# EAGLE board sterownik_uC_dla_TIER (EAGLE 4.13)
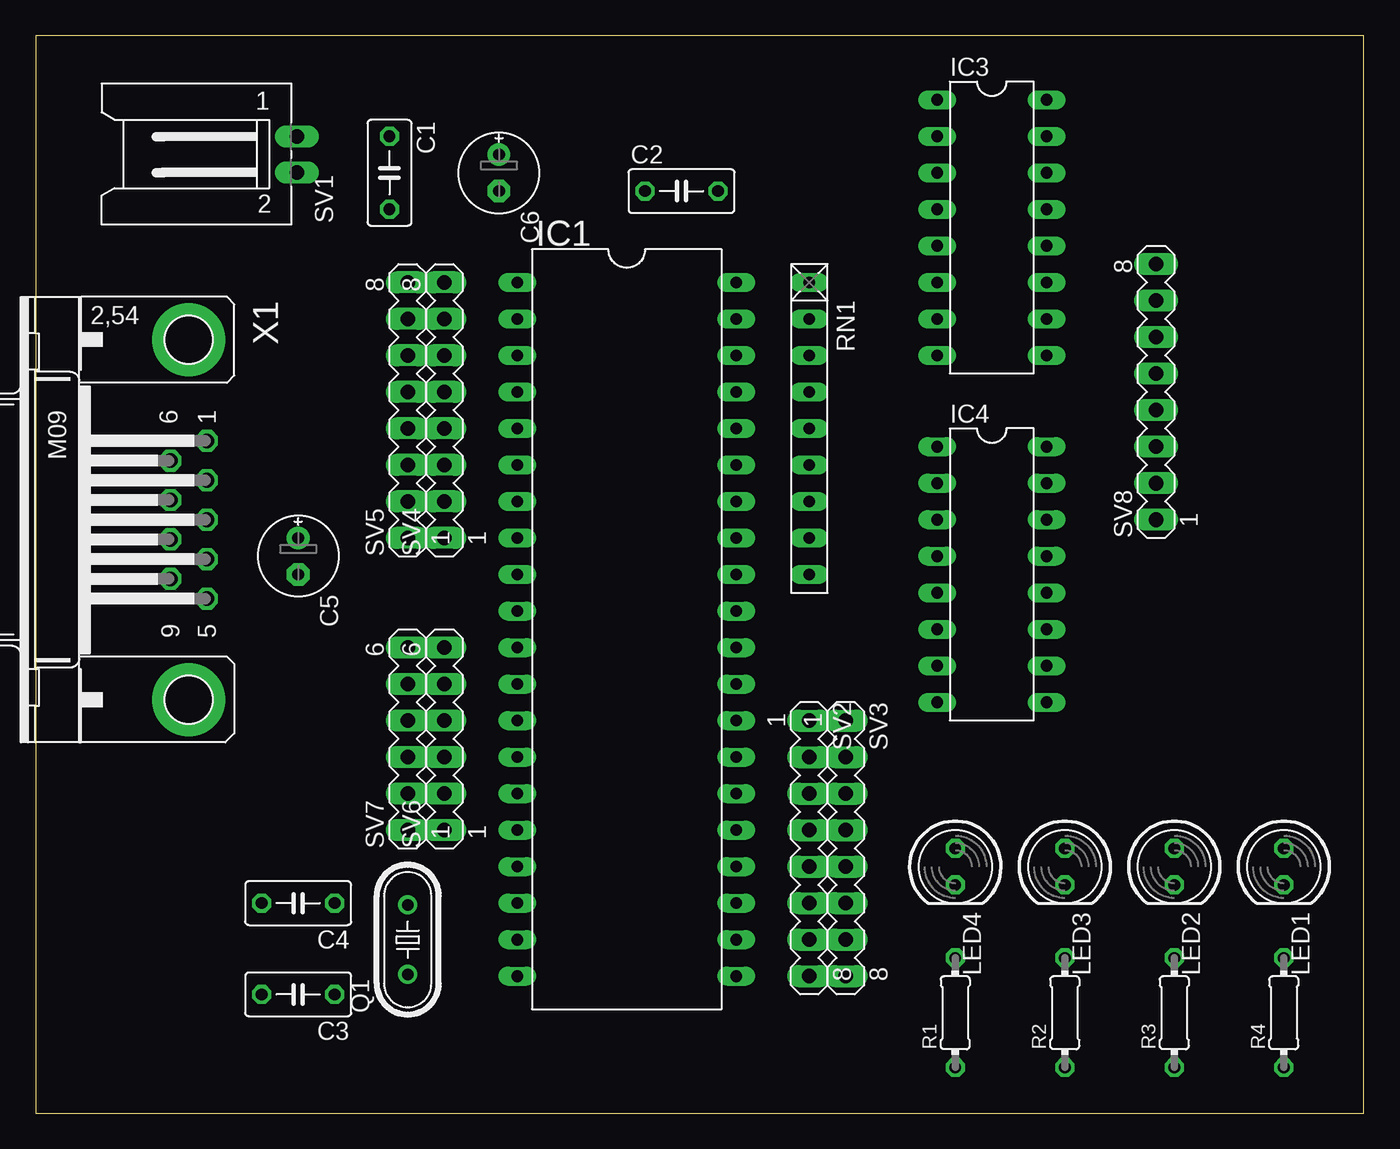
[diagram p0: board, top side]
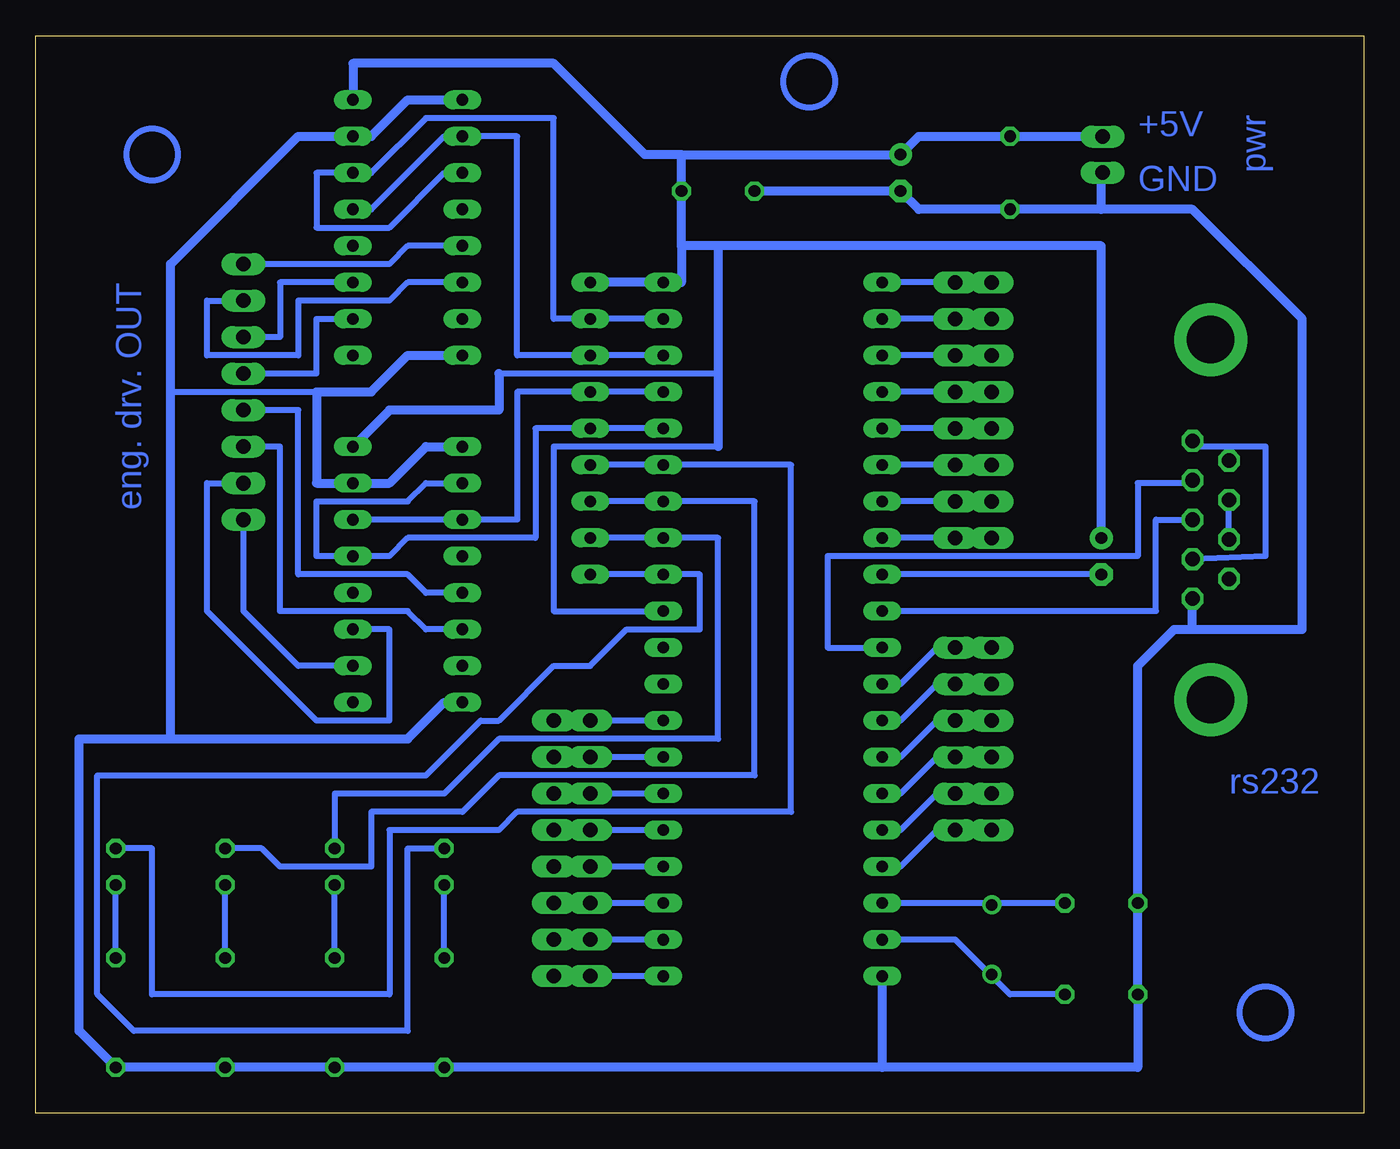
[diagram p1: board, bottom side, seen from below]

Size 92.38 x 74.92 mm. Coordinates in mm from the lower left corner, seen from the top.
Outline: 0,0 92.38,0 92.38,74.92 0,74.92 0,0
Copper layers (1*16): Top 0.035mm / dielectric 1.5mm / Bottom 0.035mm
Design rules "default": minimum track width 10mil, minimum drill 24mil, track to track 8mil, track to pad 8mil, pad to pad 8mil, via to via 8mil, smd to smd 8mil, copper to edge 40mil, drill to drill 8mil, minimum pad ring 10mil, minimum via ring 8mil, stop-mask expansion 4mil, vias tented up to drill 0mil, thermal gap 10mil

## Footprints (pad centres in the part's own frame; a part is rotated, then mirrored left to right if it is on the bottom)
C050-030X075 = drill 0.813 octagon: 1 -2.54,0; 2 2.54,0
E2,5-6E = drill 0.813 pad 1.575 round: + -1.27,0 | drill 0.813 pad 1.575 octagon: - 1.27,0
DIL40 = drill 0.813 long: 1 -24.13,-7.62; 2 -21.59,-7.62; 3 -19.05,-7.62; 4 -16.51,-7.62; 5 -13.97,-7.62; 6 -11.43,-7.62; 7 -8.89,-7.62; 8 -6.35,-7.62; 9 -3.81,-7.62; 10 -1.27,-7.62; 11 1.27,-7.62; 12 3.81,-7.62; 13 6.35,-7.62; 14 8.89,-7.62; 15 11.43,-7.62; 16 13.97,-7.62; 17 16.51,-7.62; 18 19.05,-7.62; 19 21.59,-7.62; 20 24.13,-7.62; 21 24.13,7.62; 22 21.59,7.62; 23 19.05,7.62; 24 16.51,7.62; 25 13.97,7.62; 26 11.43,7.62; 27 8.89,7.62; 28 6.35,7.62; 29 3.81,7.62; 30 1.27,7.62; 31 -1.27,7.62; 32 -3.81,7.62; 33 -6.35,7.62; 34 -8.89,7.62; 35 -11.43,7.62; 36 -13.97,7.62; 37 -16.51,7.62; 38 -19.05,7.62; 39 -21.59,7.62; 40 -24.13,7.62
DIL16 = drill 0.813 long: 1 -8.89,-3.81; 2 -6.35,-3.81; 3 -3.81,-3.81; 4 -1.27,-3.81; 5 1.27,-3.81; 6 3.81,-3.81; 7 6.35,-3.81; 8 8.89,-3.81; 9 8.89,3.81; 10 6.35,3.81; 11 3.81,3.81; 12 1.27,3.81; 13 -1.27,3.81; 14 -3.81,3.81; 15 -6.35,3.81; 16 -8.89,3.81
LED5MM = drill 0.813 octagon: A -1.27,0; K 1.27,0
HC49/S = drill 0.813 round: 1 -2.413,0; 2 2.413,0
0204/7 = drill 0.813 octagon: 1 -3.81,0; 2 3.81,0
RN-9 = drill 0.813 long: 1 -10.16,0; 2 -7.62,0; 3 -5.08,0; 4 -2.54,0; 5 0,0; 6 2.54,0; 7 5.08,0; 8 7.62,0; 9 10.16,0
L02P = drill 1.016 long: 1 1.25,-6.25; 2 -1.25,-6.25
MA08-1 = drill 1.016 long: 1 -8.89,0; 2 -6.35,0; 3 -3.81,0; 4 -1.27,0; 5 1.27,0; 6 3.81,0; 7 6.35,0; 8 8.89,0
MA06-1 = drill 1.016 long: 1 -6.35,0; 2 -3.81,0; 3 -1.27,0; 4 1.27,0; 5 3.81,0; 6 6.35,0
M09HP = drill 1.016 octagon: 1 -5.486,1.27; 2 -2.743,1.27; 3 0,1.27; 4 2.743,1.27; 5 5.486,1.27; 6 -4.115,-1.27; 7 -1.372,-1.27; 8 1.372,-1.27; 9 4.115,-1.27 | drill 3.302 pad 5.08 round: G1 -12.522,0; G2 12.522,0

## Placement (x,y rotation side)
C1  100nF  [C050-030X075]  24.6,65.4 270 top
C2  10nF  [C050-030X075]  44.92,64.13 0 top
C3  33pF  [C050-030X075]  18.25,8.25 180 top
C4  33pF  [C050-030X075]  18.25,14.6 180 top
C5  2.2uF  [E2,5-6E]  18.25,38.73 270 top
C6  10uF  [E2,5-6E]  32.22,65.4 270 top
IC1  AT89C51-24PC  [DIL40]  41.11,33.65 270 top
IC3  4555N  [DIL16]  66.51,61.59 270 top
IC4  4555N  [DIL16]  66.51,37.46 270 top
LED1  [LED5MM]  86.83,17.14 270 top
LED2  [LED5MM]  79.21,17.14 270 top
LED3  [LED5MM]  71.59,17.14 270 top
LED4  [LED5MM]  63.97,17.14 270 top
Q1  xxxMHz  [HC49/S]  25.87,12.06 90 top
R1  2k  [0204/7]  63.97,6.98 90 top
R2  2k  [0204/7]  71.59,6.98 90 top
R3  2k  [0204/7]  79.21,6.98 90 top
R4  2k  [0204/7]  86.83,6.98 90 top
RN1  3.3k  [RN-9]  53.81,47.62 270 top
SV1  [L02P]  11.9,66.67 90 top
SV2  [MA08-1]  53.81,18.41 270 top
SV3  [MA08-1]  56.35,18.41 270 top
SV4  [MA08-1]  28.41,48.89 90 top
SV5  [MA08-1]  25.87,48.89 90 top
SV6  [MA06-1]  28.41,26.03 90 top
SV7  [MA06-1]  25.87,26.03 90 top
SV8  [MA08-1]  77.94,50.16 90 top
X1  [M09HP]  10.63,41.27 270 top

## Library data of the parts
C1-C6 R1-R4 = rcl
IC1 = atmel
IC3 IC4 = 45xx
LED1-LED4 = led
Q1 = crystal
RN1 = resistor-net
SV1 = con-amp-mt
SV2-SV8 = con-lstb
X1 = con-subd

## Nets
0V: C1.2 C2.1 C3.2 C4.2 C6.- IC1.20 IC3.1 IC3.8 IC3.15 IC4.1 IC4.8 IC4.15 R1.1 R2.1 R3.1 R4.1 SV1.2 X1.5
+5V: C1.1 C2.2 C5.+ C6.+ IC1.31 IC1.40 IC3.16 IC4.16 RN1.1 SV1.1
N$1: C4.1 IC1.18 Q1.2
N$2: C3.1 IC1.19 Q1.1
N$3: IC1.39 IC3.3 IC3.14 RN1.2
N$4: IC1.38 IC3.2 IC3.13 RN1.3
N$5: C5.- IC1.9
N$6: IC3.5 SV8.8
N$7: IC1.36 IC4.2 IC4.13 RN1.5
N$8: IC1.35 LED1.A RN1.6
N$9: IC1.34 LED2.A RN1.7
N$10: IC1.33 LED3.A RN1.8
N$11: IC1.32 LED4.A RN1.9
N$12: X1.7 X1.8
N$13: IC1.10 X1.3
N$14: IC1.11 X1.2
N$15: X1.1 X1.4 X1.6
N$16: IC3.6 SV8.7
N$17: IC1.28 SV2.1 SV3.1
N$18: IC1.27 SV2.2 SV3.2
N$19: IC1.26 SV2.3 SV3.3
N$20: IC1.25 SV2.4 SV3.4
N$21: IC1.24 SV2.5 SV3.5
N$22: IC1.23 SV2.6 SV3.6
N$23: IC1.22 SV2.7 SV3.7
N$24: IC1.21 SV2.8 SV3.8
N$25: IC1.8 SV4.1 SV5.1
N$26: IC1.7 SV4.2 SV5.2
N$27: IC1.6 SV4.3 SV5.3
N$28: IC1.5 SV4.4 SV5.4
N$29: IC1.4 SV4.5 SV5.5
N$30: IC1.3 SV4.6 SV5.6
N$31: IC1.2 SV4.7 SV5.7
N$32: IC1.1 SV4.8 SV5.8
N$33: IC1.17 SV6.1 SV7.1
N$34: IC1.16 SV6.2 SV7.2
N$35: IC1.15 SV6.3 SV7.3
N$36: IC1.14 SV6.4 SV7.4
N$37: IC1.13 SV6.5 SV7.5
N$38: IC1.12 SV6.6 SV7.6
N$39: IC3.11 SV8.6
N$40: IC3.10 SV8.5
N$41: IC4.5 SV8.4
N$42: LED4.K R1.2
N$43: LED3.K R2.2
N$44: LED2.K R3.2
N$45: LED1.K R4.2
N$46: IC1.37 IC4.3 IC4.14 RN1.4
N$47: IC4.6 SV8.3
N$48: IC4.11 SV8.2
N$49: IC4.10 SV8.1

## Tracks (layer width: path | path; a pad name or v marks a point on that pad's centre or on a via)
0V
  Bottom 0.254: X1.5 11.9,36.19 | IC3.15 69.05,67.94
  Bottom 0.406: 83.02,50.16 72.86,50.16
  Bottom 0.61: 18.25,62.86 C1.2 30.95,62.86 C6.- C2.1 | 18.25,62.86 18.25,65.4 SV1.2 | 11.9,33.65 X1.5 | 18.25,62.86 11.9,62.86 4.28,55.24 4.28,33.65 11.9,33.65 | 11.9,33.65 13.17,33.65 15.71,31.11 C4.2 C3.2 15.71,3.17 33.49,3.17 | IC4.1 65.24,46.35 67.78,43.81 IC4.15 72.86,43.81 72.86,50.16 69.05,50.16 66.51,52.7 IC3.8 | 69.05,67.94 66.51,70.48 IC3.1 | 33.49,3.17 R1.1 R2.1 R3.1 R4.1 89.37,5.71 89.37,26.03 83.02,26.03 | 33.49,3.17 IC1.20 | 83.02,26.03 66.51,26.03 63.97,28.57 IC4.8 | 83.02,26.03 83.02,50.16 83.02,59.05 74.13,67.94 IC3.15
+5V
  Bottom 0.406: 44.92,46.35 56.35,46.35 56.35,34.92 IC1.31 | 44.92,51.43 60.16,51.43
  Bottom 0.61: SV1.1 19.52,67.94 C1.1 30.95,67.94 C6.+ 47.46,66.67 | 44.92,60.32 47.46,60.32 | 60.16,51.43 60.16,48.89 67.78,48.89 IC4.16 | 47.46,60.32 C2.2 47.46,66.67 | 47.46,60.32 47.46,57.78 IC1.40 RN1.1 | IC3.16 70.32,73.02 56.35,73.02 50,66.67 47.46,66.67 | C5.+ 18.25,60.32 44.92,60.32 | 44.92,60.32 44.92,51.43 44.92,46.35
N$1
  Bottom 0.254: 25.87,14.6 Q1.2
  Bottom 0.406: C4.1 25.87,14.6 IC1.18
N$2
  Bottom 0.254: 25.87,9.52 Q1.1
  Bottom 0.406: C3.1 24.6,8.25 25.87,9.52 28.41,12.06 IC1.19
N$3
  Bottom 0.254: 63.97,65.4 IC3.3
  Bottom 0.406: IC1.39 RN1.2 56.35,55.24 56.35,69.21 65.24,69.21 69.05,65.4 IC3.14 72.86,65.4 72.86,61.59 67.78,61.59 63.97,65.4
N$4
  Bottom 0.254: IC3.2 63.97,67.94 | 69.05,62.86 IC3.13
  Bottom 0.406: IC1.38 RN1.3 58.89,52.7 58.89,67.94 IC3.2 | 63.97,67.94 69.05,62.86
N$5
  Bottom 0.406: C5.- IC1.9
N$6
  Bottom 0.406: IC3.5 66.51,60.32 67.78,59.05 SV8.8
N$7
  Bottom 0.254: 72.86,38.73 IC4.13
  Bottom 0.406: IC1.36 RN1.5 57.62,47.62 57.62,40 66.51,40 67.78,38.73 72.86,38.73 72.86,42.54 66.51,42.54 65.24,43.81 IC4.2
N$8
  Bottom 0.406: RN1.6 IC1.35 39.84,45.08 39.84,20.95 58.89,20.95 60.16,19.68 67.78,19.68 67.78,8.25 84.29,8.25 84.29,18.41 LED1.A
N$9
  Bottom 0.406: RN1.7 IC1.34 42.38,42.54 42.38,23.49 60.16,23.49 62.7,20.95 69.05,20.95 69.05,17.14 75.4,17.14 76.67,18.41 LED2.A
N$10
  Bottom 0.406: RN1.8 IC1.33 44.92,40 44.92,26.03 60.16,26.03 63.97,22.22 71.59,22.22 LED3.A
N$11
  Bottom 0.406: RN1.9 IC1.32 46.19,37.46 46.19,33.65 51.27,33.65 53.81,31.11 56.35,31.11 60.16,27.3 61.43,27.3 65.24,23.49 88.1,23.49 88.1,8.25 85.56,5.71 66.51,5.71 66.51,18.41 LED4.A
N$12
  Bottom 0.406: X1.8 X1.7
N$13
  Bottom 0.406: X1.3 14.44,41.27 14.44,34.92 IC1.10
N$14
  Bottom 0.254: X1.2 11.9,43.81
  Bottom 0.406: 11.9,43.81 15.71,43.81 15.71,38.73 37.3,38.73 37.3,32.38 IC1.11
N$15
  Bottom 0.254: 11.9,46.35 X1.1 | 9.36,46.35 X1.6
  Bottom 0.406: X1.4 6.82,38.73 6.82,46.35 9.36,46.35 11.9,46.35
N$16
  Bottom 0.406: IC3.6 66.51,57.78 67.78,56.51 74.13,56.51 74.13,52.7 80.48,52.7 80.48,56.51 SV8.7
N$17
  Bottom 0.406: IC1.28 SV2.1 SV3.1
N$18
  Bottom 0.406: IC1.27 SV2.2 SV3.2
N$19
  Bottom 0.406: IC1.26 SV2.3 SV3.3
N$20
  Bottom 0.406: IC1.25 SV2.4 SV3.4
N$21
  Bottom 0.406: IC1.24 SV2.5 SV3.5
N$22
  Bottom 0.406: IC1.23 SV2.6 SV3.6
N$23
  Bottom 0.406: IC1.22 SV2.7 SV3.7
N$24
  Bottom 0.406: IC1.21 SV2.8 SV3.8
N$25
  Bottom 0.406: IC1.8 SV4.1 SV5.1
N$26
  Bottom 0.406: IC1.7 SV4.2 SV5.2
N$27
  Bottom 0.406: IC1.6 SV4.3 SV5.3
N$28
  Bottom 0.406: IC1.5 SV4.4 SV5.4
N$29
  Bottom 0.406: IC1.4 SV4.5 SV5.5
N$30
  Bottom 0.406: IC1.3 SV4.6 SV5.6
N$31
  Bottom 0.406: IC1.2 SV4.7 SV5.7
N$32
  Bottom 0.406: IC1.1 SV4.8 SV5.8
N$33
  Bottom 0.254: 32.22,17.14 IC1.17
  Bottom 0.406: 32.22,17.14 29.68,19.68 SV6.1 SV7.1
N$34
  Bottom 0.254: 32.22,19.68 IC1.16
  Bottom 0.406: 32.22,19.68 29.68,22.22 SV6.2 SV7.2
N$35
  Bottom 0.254: 32.22,22.22 IC1.15
  Bottom 0.406: 32.22,22.22 29.68,24.76 SV6.3 SV7.3
N$36
  Bottom 0.254: 32.22,24.76 IC1.14
  Bottom 0.406: 32.22,24.76 29.68,27.3 SV6.4 SV7.4
N$37
  Bottom 0.254: 32.22,27.3 IC1.13
  Bottom 0.406: 29.68,29.84 32.22,27.3 | SV7.5 SV6.5
  Bottom 0.61: SV6.5 29.68,29.84
N$38
  Bottom 0.254: 32.22,29.84 IC1.12
  Bottom 0.406: 32.22,29.84 29.68,32.38 SV6.6 SV7.6
N$39
  Bottom 0.406: IC3.11 75.4,57.78 75.4,53.97 SV8.6
N$40
  Bottom 0.406: IC3.10 72.86,55.24 72.86,51.43 SV8.5
N$41
  Bottom 0.406: IC4.5 65.24,36.19 66.51,37.46 74.13,37.46 74.13,48.89 SV8.4
N$42
  Bottom 0.406: R1.2 LED4.K
N$43
  Bottom 0.406: R2.2 LED3.K
N$44
  Bottom 0.406: R3.2 LED2.K
N$45
  Bottom 0.406: R4.2 LED1.K
N$46
  Bottom 0.406: IC1.37 RN1.4 58.89,50.16 58.89,41.27 IC4.3 IC4.14
N$47
  Bottom 0.406: IC4.6 65.24,33.65 66.51,34.92 75.4,34.92 75.4,46.35 SV8.3
N$48
  Bottom 0.406: IC4.11 67.78,33.65 67.78,27.3 72.86,27.3 80.48,34.92 80.48,43.81 SV8.2
N$49
  Bottom 0.406: SV8.1 77.94,34.92 74.13,31.11 IC4.10
(copper drawn outside any net)
  shapes: Bottom circle x3

## Text on the board
Bottom: +5V | pwr | GND | eng. drv. OUT | rs232